# Altium PCB SubsystemA_NEW.PcbDoc
Units mm, origin at the board's own origin, x right, y up, seen from the top; angles counter-clockwise.
Board outline 128.27 x 38.1 mm, 2 copper layers (Top Layer, Bottom (GND)); 47 components, 32 nets, 124 pads, 22 vias.
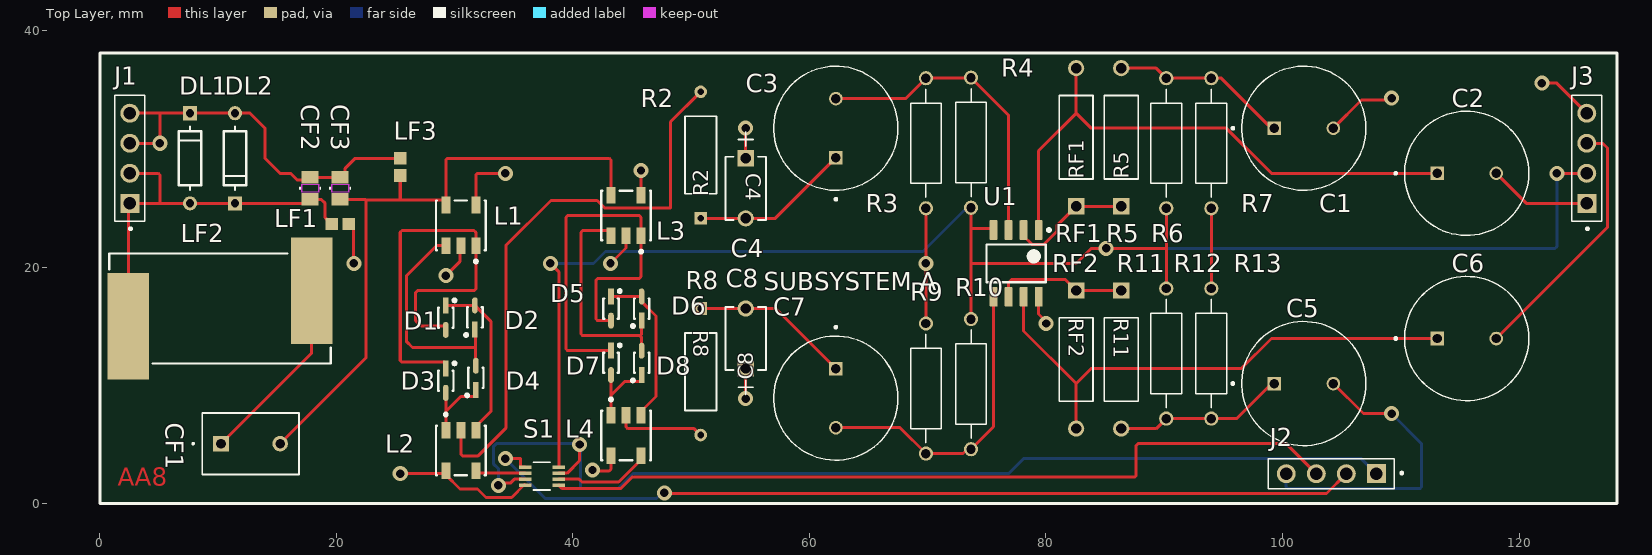
[diagram p0: Top Layer view]
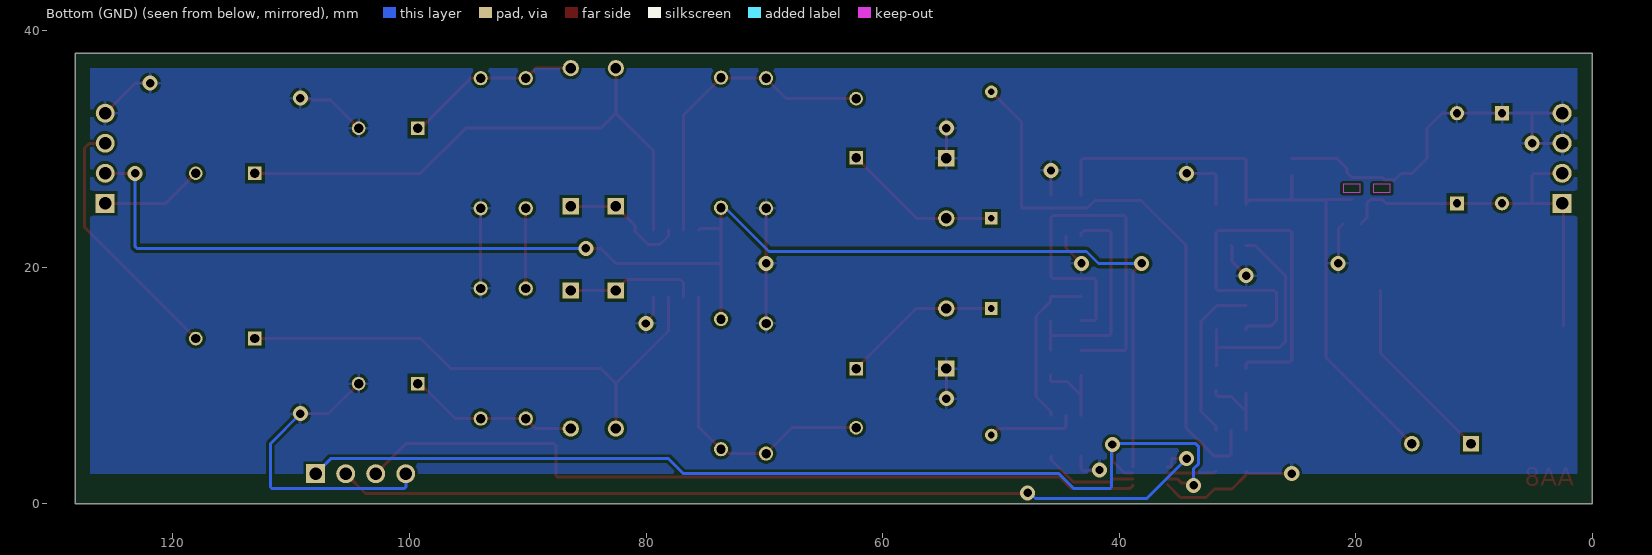
[diagram p1: Bottom (GND) view, seen from below]
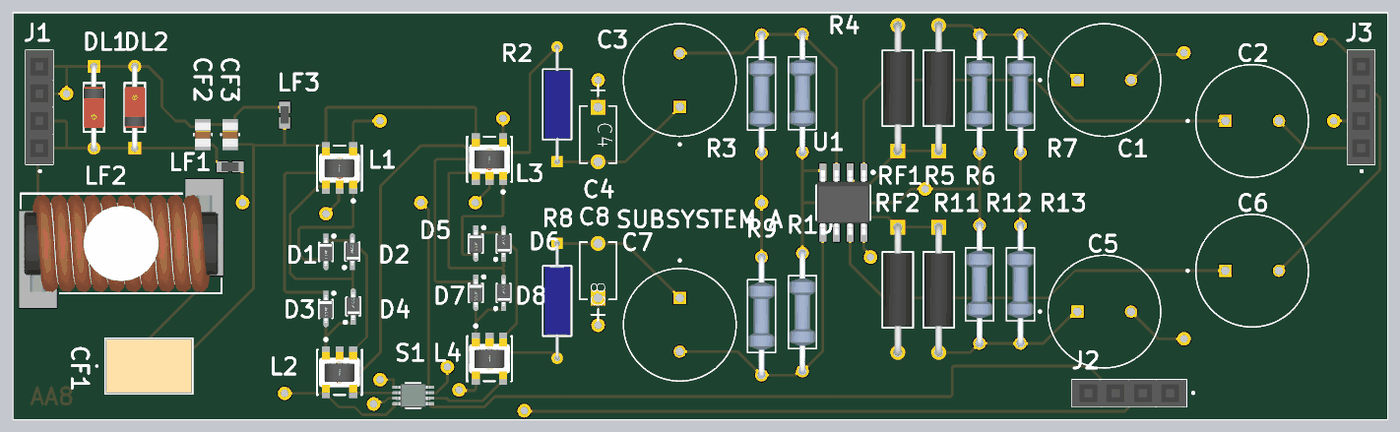
[diagram p2: 3D render of the assembled board from above, using the file's embedded part models]

## Layer stack, top to bottom
Top Solder: solder mask 0.0102, Solder Resist, Dk 3.5
Top Layer: signal copper 0.0356
Dielectric 1: dielectric 0.32, FR-4, Dk 4.8
Bottom (GND): signal copper 0.0356
Bottom Solder: solder mask 0.0102, Solder Resist, Dk 3.5

## Board outline
0,38.1 0,0 128.27,0 128.27,38.1

## Design rules (kind name [scope] priority, off if disabled: settings)
Clearance [All] p1: gap=0.254 ignorepadtopadclearanceinfootprint=FALSE except(0: Arc-Hole Track-Hole SMDPad-Hole THPad-Hole Via-Hole Fill-Hole Poly-Hole Region-Hole Text-Hole)
PolygonConnect [All] p1: connectstyle=Relief reliefconductorwidth=0.254 reliefentries=4 polygonreliefangle="90 Angle" airgapwidth=0.254
RoutingVias [All] p1: holewidth=0.711 width=1.27 viastyle="Through Hole" minholewidth=0.711 minwidth=1.27 maxholewidth=0.711 maxwidth=1.27
SolderMaskExpansion [All] p1: expansion=0.102 istentingtop=FALSE
SupplyNets "Schematic Supply Nets_1" [InNet('+5')] p1: voltage=0.000
SupplyNets "Schematic Supply Nets" [InNet('GND')] p2: voltage=0.000
Width [All] p1: maxlimit=0.254 minlimit=0.254 preferedwidth=0.254
30 further rules are at their usual default settings.

## Components (designator, comment, footprint, x,y, rotation, side; value= is the part's Value field where it differs from the comment)
C1 "470uF" CAPPRD500W60D1050H2200 101.798,31.75 r180 top
C2 "470uF" CAPPRD500W60D1050H2200 115.57,27.94 r180 top
C3 "470uF" CAPPRD500W60D1050H2200 62.23,31.75 r270 top
C4 "10nF" CAP_C322C511_MR_KEM 54.61,29.21 r270 top
C5 "470uF" CAPPRD500W60D1050H2200 101.798,10.16 r180 top
C6 "470uF" CAPPRD500W60D1050H2200 115.57,13.97 r180 top
C7 "470uF" CAPPRD500W60D1050H2200 62.23,8.93 r90 top
C8 "10nF" CAP_C322C511_MR_KEM 54.61,11.43 r90 top
CF1 "100pF" CAP_FKP20101001D00KSSD_WIM 10.24,5.08 r0 top
CF2 "390pF" CAP_J1_PAN 17.78,26.67 r270 top
CF3 "390pF" CAP_J1_PAN 20.32,26.67 r270 top
D1 "BAT54WS-TP" FP-SOD-323-IPC_B 29.25,15.721 r270 top
D2 "BAT54WS-TP" FP-SOD-323-IPC_B 31.71,15.75 r90 top
D3 "BAT54WS-TP" FP-SOD-323-IPC_B 29.25,10.397 r270 top
D4 "BAT54WS-TP" FP-SOD-323-IPC_B 31.79,10.641 r90 top
D5 "BAT54WS-TP" FP-SOD-323-IPC_B 43.22,16.502 r270 top
D6 "BAT54WS-TP" FP-SOD-323-IPC_B 45.81,16.502 r90 top
D7 "BAT54WS-TP" FP-SOD-323-IPC_B 43.22,11.911 r270 top
D8 "BAT54WS-TP" FP-SOD-323-IPC_B 45.81,11.911 r90 top
DL1 "1N914B" FP-017AG-MFG 7.62,29.21 r270 top value=4pF
DL2 "1N914B" FP-017AG-MFG 11.43,29.21 r90 top value=4pF
J1 "PPTC041LFBN-RC" SULLINS_PPTC041LFBN-RC 2.54,29.21 r90 top
J2 "PPTC041LFBN-RC" SULLINS_PPTC041LFBN-RC 104.124,2.54 r180 top
J3 "PPTC041LFBN-RC" SULLINS_PPTC041LFBN-RC 125.73,29.21 r90 top
L1 "MABAES0060" FP-MABAES0060-MFG 30.52,23.542 r270 top
L2 "MABAES0060" FP-MABAES0060-MFG 30.52,4.492 r90 top
L3 "MABAES0060" FP-MABAES0060-MFG 44.49,24.367 r270 top
L4 "MABAES0060" FP-MABAES0060-MFG 44.49,5.762 r90 top
LF1 "500nH" INDC1608X100N 20.32,23.662 r180 top
LF2 "1.96uH" 7847229020 10.16,16.51 r0 top
LF3 "500nH" INDC1608X100N 25.4,28.482 r270 top
R2 "165" RES_MFR25_6P3X2P4_YAG 50.8,24.13 r90 top
R3 "10k" RESAD1100W55L680D260 69.85,30.48 r270 top
R4 "10k" RESAD1100W55L680D260 73.66,30.527 r90 top
R5 "1k" YAG_MF25_YAG 86.36,25.146 r90 top
R6 "10k" RESAD1100W55L680D260 90.17,30.48 r270 top
R7 "10k" RESAD1100W55L680D260 93.98,30.48 r90 top
R8 "165" RES_MFR25_6P3X2P4_YAG 50.8,16.51 r270 top
R9 "10k" RESAD1100W55L680D260 69.85,9.74 r90 top
R10 "10k" RESAD1100W55L680D260 73.66,10.113 r270 top
R11 "1k" YAG_MF25_YAG 86.36,18.034 r270 top
R12 "10k" RESAD1100W55L680D260 90.17,12.7 r270 top
R13 "10k" RESAD1100W55L680D260 93.98,12.7 r90 top
RF1 "48.7k" YAG_MF25_YAG 82.55,25.146 r90 top
RF2 "48.7k" YAG_MF25_YAG 82.55,18.034 r270 top
S1 "FSA1259AK8X" US8-8_2P1X2P4_ONS 37.383,2.33 r0 top
U1 "OPA1642AIDR" D0008A_M 77.47,20.32 r270 top

## Footprints (in the part's own frame and the unit in brackets; to place one, negate y for a bottom-side part, rotate by r counter-clockwise, add the part's x,y. Pads: shape width x height; smd on the part's side, far side on the other; paste and mask are expansions set on the pad)
7847229020 [mm] "Rod Core Inductor SMT, body 18.1x9.3mm"
  rect 3.5x9 smd: 1(-7.75,-1.5) 2(7.75,1.5)
  silkscreen extent -9.35,-4.65 9.35,4.65, body extent -9.05,-4.57 9.05,4.57, height 10.03
CAP_C322C511_MR_KEM [mil]
  rect 54x54 hole 34 paste-99999 mask+0: 1(0,0)
  round 54 hole 34 paste-99999 mask+0: 2(200,0)
  silkscreen extent -87,-68 205,68
CAP_FKP20101001D00KSSD_WIM [mil]
  rect 52x52 / inner round 60 / far side rect 52x52 hole 32 paste-99999 mask+0: 1(0,0)
  round 52 / inner round 60 / far side round 52 hole 32 paste-99999 mask+0: 2(196.85,0)
  silkscreen extent -96,-102 259,102, body extent -58,-97 254,97, height 260
CAP_J1_PAN [mil]
  rect 42x57 smd paste+0 mask+0: 1(-36.5,0) 2(36.5,0)
  Top Layer keep-out region: -13.5,-26.5 -13.5,26.5 13.5,26.5 13.5,-26.5
  Keep-Out Layer region: -13.5,-28.5 -13.5,28.5 13.5,28.5 13.5,-28.5
  silkscreen extent -3,-34 3,34, body extent -44,-29 44,29, height 43
CAPPRD500W60D1050H2200 [mm]
  rect 1.15x1.15 / inner round 1.15 / far side rect 1.15x1.15 hole 0.8: 1(2.5,0)
  round 1.15 hole 0.8: 2(-2.5,0)
  silkscreen extent -5.25,-5.25 6.1,5.25
D0008A_M [mm] "SOIC, 8-Leads, Body 5x4mm, Pitch 1.27mm, IPC Low Density"
  rrect15% 1.65x0.65 smd: 1(-2.825,1.905) 2(-2.825,0.635) 3(-2.825,-0.635) 4(-2.825,-1.905) 5(2.825,-1.905) 6(2.825,-0.635) 7(2.825,0.635) 8(2.825,1.905)
  silkscreen extent -2.95,-2.5 1.6,2.91, body extent -3,-2.45 3,2.45, height 1.63
FP-017AG-MFG [mm]
  rect 1.2x1.2 hole 0.7 paste-2539.97 mask+0: 1(-3.813,0)
  round 1.2 hole 0.7 paste-2539.97 mask+0: 2(3.813,0)
  silkscreen extent -2.68,-0.95 2.68,0.95, body extent -4.51,-1.05 4.51,1.05, height 0.25
FP-MABAES0060-MFG [mm]
  rect 1.4x0.76 smd paste+0 mask+0: 1(1.715,1.27) 2(1.715,0) 3(1.715,-1.27) 4(-1.715,-1.27) 5(-1.715,1.27)
  silkscreen extent -2.09,-2.09 3.18,2.09, body extent -2.51,-2.19 2.51,2.19, height 0.25
FP-SOD-323-IPC_B [mm]
  rect 1.355x0.476 smd paste+0 mask+0: 1(-1.026,0)
  rrect100% 1.355x0.476 smd paste+0 mask+0: 2(1.026,0)
  silkscreen extent -1.6,-0.65 0.85,0.86, body extent -1.95,-0.87 1.95,0.87, height 0.25
INDC1608X100N [mm]
  rect 1.06x1.02 smd: 1(-0.728,0) 2(0.728,0)
  body extent -0.8,-0.4 0.8,0.4, height 1
RES_MFR25_6P3X2P4_YAG [mil]
  rect 42x42 hole 22 paste-99999 mask+0: 1(0,0)
  round 42 hole 22 paste-99999 mask+0: 2(421.26,0)
  silkscreen extent 82,-52 340,53, body extent -6,-47 427,47, height 95
RESAD1100W55L680D260 [mm]
  round 1.2 hole 0.8: 1(-5.5,0) 2(5.5,0)
  silkscreen extent -4.58,-1.3 4.58,1.3, body extent -5.77,-1.2 5.77,1.2, height 2.4
SULLINS_PPTC041LFBN-RC [mm]
  rect 1.605x1.605 / inner round 1.605 / far side rect 1.605x1.605 hole 1.07: 1(-3.81,0)
  round 1.605 hole 1.07: 2(-1.27,0) 3(1.27,0) 4(3.81,0)
  silkscreen extent -6.06,-1.27 5.33,1.27, body extent -5.33,-1.27 5.33,1.27, height 8.51
US8-8_2P1X2P4_ONS [mil]
  rect 42x11 smd paste+0 mask+0: 1(-56,30) 2(-56,10) 3(-56,-10) 4(-56,-30) 5(56,-30) 6(56,-10) 7(56,10) 8(56,30)
  silkscreen extent -28,-46 28,46, body extent -63,-41 63,41, height 35
YAG_MF25_YAG [mil]
  rect 54x54 hole 34 paste-99999 mask+0: 1(0,0)
  round 54 hole 34 paste-99999 mask+0: 2(460,0)
  silkscreen extent 91,-56 369,57, body extent -12,-51 472,51, height 103

## Part data
C1 C2 C3 C5 C6 C7: library part UPW1V471MPD, Package=None, Availability=Unavailable, MP=UPW1V471MPD, Price=None
C4 C8: library part C322C103K3G5TA, "No Description Available", Manufacturer_Name=Kemet, Copyright="Copyright (C) 2026 Ultra Librarian. All rights reserved.", Manufacturer_Part_Number=C322C103K3G5TA
CF1: library part FKP2O101001D00KSSD, "Description", Manufacturer_Name=Wima, Copyright="Copyright (C) 2025 Ultra Librarian. All rights reserved.", Manufacturer_Part_Number=FKP2O101001D00KSSD
CF2 CF3: library part ECH-U1H391GX5, "No Description Available", Manufacturer_Name=Panasonic, Copyright="Copyright (C) 2026 Ultra Librarian. All rights reserved.", Manufacturer_Part_Number=ECH-U1H391GX5
D1 D2 D3 D4 D5 D6 D7 D8: library part CMP-56206-000013-1, "DIODE SCHOTTKY 30V 200MA SOD323", Average Rectified Current=200mA, Capacitance=2pF, Forward Voltage=1V, Max Operating Temperature=125°C, Max Repetitive Reverse Voltage (Vrrm)=30V, Max Reverse Current=2uA, Max Reverse Leakage Current=500nA, Min Operating Temperature=-55°C, Package Quantity=1, Peak Non-Repetitive Surge Current=600mA, Power Dissipation=200mW, Current Rating=200mA, Element Configuration=Single, Forward Current=200mA, Height=1mm, Lead Free="Lead Free", Length=1.8mm, Max Forward Surge Current (Ifsm)=200mA, Max Reverse Voltage (DC)=30V, Mount="Surface Mount", Number of Pins=2, Output Current=200mA, Packaging="Tape and Reel", Polarity=Standard, Radiation Hardening=No, Reverse Recovery Time=5ns, RoHS Compliant=Yes, Voltage Rating (DC)=30V, Width=1.35mm
DL1 DL2: library part CMP-07163-000001-1, "DIODE GEN PURP 100V 200MA DO35", Capacitance=4pF, Forward Current=300mA, Manufacturer="ON Semiconductor", Max Junction Temp=+175°C, Max Repetitive Reverse Voltage=100V, Max Surge Forward Current=1A, Package=017AG, Peak Reverse Current=5uA, Temperature="-55°C to +175°C", Temperature Range Low=-55°C, Automotive=No, Category=Diode, ComponentLink2Description=Datasheet, ComponentLink2URL=https://www.onsemi.com/pub/Collateral/1N914-D.PDF, Device Class L1="Discrete Semiconductors", Device Class L2=Diodes, Device Class L3="Rectifier Diodes", Digikey Description="DIODE GEN PURP 100V 200MA DO35", Footprint Url=https://www.onsemi.com/pub/Collateral/017AG.PDF, Height=1.91mm, Lead Free=Yes, Manufacturer Part Number=1N914B, Mouser Description="Diodes - General Purpose, Power, Switching 100V Io/200mA BULK", Octopart=https://octopart.com/1n914b-on+semiconductor-84323163, Reverse Voltage=100V, RoHS=TRUE, Temperature Range High=+175°C
J1 J2 J3: "4 Position Header Connector 0.100 (2.54mm) Through Hole Tin", Package=None, Check_prices=https://www.snapeda.com/parts/PPTC041LFBN-RC/Sullins/view-part/?ref=eda, MF="Sullins Connector", MP=PPTC041LFBN-RC, SnapEDA_Link=https://www.snapeda.com/parts/PPTC041LFBN-RC/Sullins/view-part/?ref=snap
L1 L2 L3 L4: library part CMP-97513-000003-1, "BALUN 300KHZ-200MHZ 1:1 6SMD", Case/Package=SMD/SMT, Max DC Current=500mA, Max Operating Temperature=85°C, Min Operating Temperature=-40°C, Package Quantity=2000, Power Rating=500mW, Depth=3.81mm, Height=2.67mm, Insertion Loss=1.5dB, Lead Free="Lead Free", Lead/Base Style="Gull Wing", Length=3.81mm, Mount="Surface Mount", Number of Pins=5, Packaging="Tape and Reel", Radiation Hardening=No, Termination=SMD/SMT, Turns Ratio=1:1, Width=3.81mm
LF1 LF3: library part BRC1608TR50M6, "500 nH Unshielded Drum Core, Wirewound Inductor 1.05 A 90mOhm 0603 (1608 Metric)", Package="1608 Taiyo Yuden", Check_prices=https://www.snapeda.com/parts/BRC1608TR50M6/Taiyo+Yuden/view-part/?ref=eda, MF="Taiyo Yuden", MP=BRC1608TR50M6, SnapEDA_Link=https://www.snapeda.com/parts/BRC1608TR50M6/Taiyo+Yuden/view-part/?ref=snap
LF2: library part CMP-03913-112295598-3, "Inductor, 1.96Uh, Unshielded, 15A Rohs Compliant: Yes", Ambient Temperature Range High=110°C, Ambient Temperature Range Low=-40°C, Current Rating=15A, DC Resistance (DCR)=2.4mΩ, Inductance=1.96µH, Max Operating Temperature=150°C, Diameter=9.3mm, Height=10mm, Length=18mm, Min Operating Temperature=-40°C, Pin Length=5.5mm, RoHS=Compliant
R2 R8: library part MFR-25FRF52-165R, "No Description Available", Manufacturer_Name=Yageo, Copyright="Copyright (C) 2026 Ultra Librarian. All rights reserved.", Manufacturer_Part_Number=MFR-25FRF52-165R
R3 R4 R6 R7 R9 R10 R12 R13: library part MFR-25FRF52-10K, "10.5 kOhms Â±1% 0.25W, 1/4W Through Hole Resistor Axial - Metal Film", Package="RADIAL-2 YAGEO", Check_prices=https://www.snapeda.com/parts/MFR-25FRF52-10K/Yageo/view-part/?ref=eda, MF=Yageo, MP=MFR-25FRF52-10K, SnapEDA_Link=https://www.snapeda.com/parts/MFR-25FRF52-10K/Yageo/view-part/?ref=snap
R5 R11: library part MFR-25FRF52-1K, "Description", Manufacturer_Name=Yageo, Copyright="Copyright (C) 2025 Ultra Librarian. All rights reserved.", Manufacturer_Part_Number=MFR-25FRF52-1K
RF1 RF2: library part MFR-25FBF52-48K7, "No Description Available", Manufacturer_Name=Yageo, Copyright="Copyright (C) 2026 Ultra Librarian. All rights reserved.", Manufacturer_Part_Number=MFR-25FBF52-48K7
S1: "No Description Available", Manufacturer_Name="onsemi / Fairchild Semiconductor", Copyright="Copyright (C) 2026 Ultra Librarian. All rights reserved.", Manufacturer_Part_Number=FSA1259AK8X, RefDes=RefDes, Type=Type
U1: library part CMP-0808-00011-2, "Sound-Plus High-Performance, JFET-Input Audio Operational Amplifier, 4.5 to 36 V, -40 to 85 degC, 8-pin SOIC (D8), Green (RoHS & no Sb/Br)", Manufacturer="Texas Instruments", Code_JEDEC=MS-012, ComponentLink1Description="Manufacturer URL", ComponentLink1URL=http://www.ti.com/, ComponentLink2Description=Datasheet, ComponentLink2URL=http://www.ti.com/general/docs/lit/getliterature.tsp?genericPartNumber=OPA1642&fileType=pdf, ComponentLink3Description="Package Specification", ComponentLink3URL=http://www.ti.com/litv/pdf/msoi002j, DatasheetVersion=SBOS484B, Eco-Plan="Green (RoHS & no Sb/Br)", GBW(Typ)(MHz)=11, Iq per channel(Max)(mA)=2.3, Mounting Technology="Surface Mount", Number of Channels=2, PackageDescription="8-Pin Plastic Small Outline, Body 4.9 x 3.9 mm, Pitch 1.27 mm", PackageReference=D0008A, PackageVersion="4040047-3/M, 06/2011", PartNumber=OPA1642AIDR, SubFamily="Audio Operational Amplifier", Vmax(V)=36, Vmin(V)=5, Vn at Flatband(Typ)(nV/rtHz)=5.1

## Via types
v1: diameter 1.27, hole 0.711, Top Layer to Bottom (GND), 22 vias

## Nets (pads, with @x,y where several pads share a name; then routed paths per layer and width w, separated by ;. In a path a pad name is that pad's centre, name@x,y a point inside that pad or via, vN(x,y) a via of type N, cw(c..) or ccw(c..) an arc to the next point about the centre after c; other vN are vias at no path point)
+5: J3.2 R4.1 R6.2 R10.1 R12.1 S1.8 U1.4 | length 137
  Top Layer w0.254: v1(38.1,20.32) 38.806,19.614 S1.8 ; R10.1@73.66,15.66 73.66,20.32 ; R4.1@73.66,24.98 73.66,23.285 ; U1.4 75.425,23.285 73.66,23.285 ; R12.1 90.17,21.59 ; R6.2 90.17,21.59 ; v1(123.19,27.94) J3.2 ; 73.66,20.32 82.55,20.32 83.82,21.59 v1(85.09,21.59) 90.17,21.59 ; 73.66,20.32 73.66,23.285
  Bottom (GND) w0.254: v1(38.1,20.32) 41.743,20.32 42.759,21.336 69.596,21.336 73.059,24.799 73.479,24.799 R4.1@73.66,24.98 ; v1(85.09,21.59) 123.041,21.59 123.19,21.739 v1(123.19,27.94)
GND: C1.2 C4.1 C5.2 C8.1 CF2.1 CF3.1 DL1.1 DL2.2 J1.3 J1.4 J2.4 J3.4 L1.2 L1.5 L2.5 L3.2 L3.5 L4.5 LF1.1 LF3.1 R3.2 R7.1 R9.2 R13.2 S1.4 U1.8 | length 125.2
  Top Layer w0.254: J1.3 v1(5.08,30.48) 5.079,30.481 5.079,33.02 ; J1.4 5.079,33.02 ; LF1.1 21.068,23.662 21.451,23.279 21.451,20.349 v1(21.48,20.32) ; v1(25.4,2.54) 29.013,2.54 L2.5 29.25,2.457 30.458,1.248 31.927,1.248 32.644,0.532 34.822,0.532 S1.4@35.91,1.62 ; LF3.1 21.59,29.21 20.743,28.363 20.743,28.003 20.336,27.597 CF3.1 CF2.1 17.577,27.394 16.672,27.394 16.126,27.94 15.24,27.94 13.97,29.21 13.97,31.753 12.7,33.023 DL2.2 DL1.1 7.617,33.02 5.079,33.02 ; v1(29.25,19.287) 30.434,20.471 30.434,21.741 L1.2 ; L1.5 31.79,27.791 31.938,27.94 v1(34.29,27.94) ; v1(41.656,2.854) 41.733,2.777 43.071,2.777 43.22,2.926 L4.5 ; v1(43.18,20.32) 44.49,21.63 L3.2 ; L3.5 v1(45.76,28.177) ; v1(54.61,8.89) C8.1 ; C4.1 v1(54.61,31.75) ; R9.2 v1(69.85,20.32) R3.2 ; U1.8 79.375,16.042 80.01,15.407 v1(80.01,15.24) ; R13.2 R7.1 ; C5.2 106.838,7.62 v1(109.22,7.62) ; C1.2 106.68,34.132 109.062,34.132 v1(109.22,34.29) ; v1(121.92,35.56) 123.19,35.56 J3.4
  Bottom (GND) w0.254: J2.4 100.314,1.419 100.463,1.27 111.611,1.27 111.76,1.419 111.76,5.08 v1(109.22,7.62)
NetC1_1: C1.1 R5.2 R6.1 R7.2 | length 14.9
  Top Layer w0.254: R5.2 89.32,36.83 R6.1 93.742,35.98 94.83,35.98 C1.1@99.1,31.71
NetC2_1: C2.1 RF1.2 U1.1 | length 47.6
  Top Layer w0.254: U1.1 79.375,29.845 82.55,33.02 ; RF1.2 82.55,33.02 ; C2.1 99.06,27.94 95.25,31.75 83.82,31.75 82.55,33.02
NetC2_2: C2.2 J3.1 | length 8.7
  Top Layer w0.254: C2.2 120.61,25.4 J3.1
NetC3_1: C3.1 C4.2 R2.1 | length 13.6
  Top Layer w0.254: R2.1 C4.2 57.11,24.13 C3.1
NetC3_2: C3.2 R3.1 R4.2 U1.3 | length 26.4
  Top Layer w0.254: C3.2 68.12,34.25 R3.1 69.874,36.004 73.636,36.004 R4.2 76.835,32.852 U1.3
NetC5_1: C5.1 R11.2 R12.2 R13.1 | length 14.3
  Top Layer w0.254: R11.2 89.32,6.35 R12.2 93.782,7.2 96.14,7.2 C5.1@99.1,10.16
NetC6_1: C6.1 RF2.2 U1.7 | length 45.1
  Top Layer w0.254: U1.7 78.105,14.605 82.55,10.16 ; RF2.2 82.55,10.16 ; C6.1 99.06,13.97 96.52,11.43 83.82,11.43 82.55,10.16
NetC6_2: C6.2 J3.3 | length 21.9
  Top Layer w0.254: C6.2 127.468,23.368 127.468,30.071 127.06,30.48 J3.3
NetC7_1: C7.1 C8.2 R8.1 | length 13.5
  Top Layer w0.254: R8.1 C8.2 57.15,16.51 C7.1
NetC7_2: C7.2 R9.1 R10.2 U1.5 | length 26.2
  Top Layer w0.254: C7.2 67.66,6.43 R9.1 72.984,4.24 73.404,4.66 R10.2@73.66,4.66 ; R10.2 75.565,6.518 U1.5
NetCF1_1: CF1.1 LF2.2 | length 16.1
  Top Layer w0.254: CF1.1 17.91,12.75 LF2.2
NetCF1_2: CF1.2 CF3.2 L1.4 L3.4 LF3.2 | length 55.8
  Top Layer w0.254: CF1.2 22.496,12.336 22.496,25.658 ; CF3.2 22.411,25.743 22.496,25.658 ; LF3.2 25.4,25.663 ; L3.4 43.22,29.061 43.071,29.21 29.398,29.21 29.25,29.061 L1.4 29.25,25.41 28.997,25.663 25.4,25.663 ; 22.496,25.658 22.502,25.663 25.4,25.663
NetCF2_2: CF2.2 DL1.2 DL2.1 J1.1 J1.2 LF1.2 LF2.1 | length 34.2
  Top Layer w0.254: LF2.1 2.41,25.27 J1.1 2.543,25.397 5.082,25.397 ; J1.2 4.933,27.94 5.082,27.791 5.082,25.397 ; LF1.2 19.572,23.662 19.05,24.184 19.05,25.4 18.736,25.714 17.809,25.714 CF2.2 17.434,25.397 DL2.1 DL1.2 5.082,25.397
NetD1_1: D1.1 D2.2 L2.3 | length 14.1
  Top Layer w0.254: D1.1@29.278,16.776 D2.2 33.06,15.427 33.06,7.797 31.79,6.527 L2.3
NetD1_2: D1.2 D3.1 L1.1 | length 37.1
  Top Layer w0.254: D3.1 29.25,11.862 29.139,11.973 25.549,11.973 25.4,12.122 25.4,22.948 25.549,23.097 31.641,23.097 31.79,22.948 L1.1 31.79,18.166 31.641,18.017 26.858,18.017 26.71,17.868 26.71,15.477 27.178,15.008 29.147,15.008 29.25,14.906 D1.2
NetD2_1: D2.1 D4.2 L1.3 | length 19.1
  Top Layer w0.254: L1.3 28.489,21.827 25.908,19.246 25.908,13.738 26.431,13.215 31.75,13.215 ; D2.1@31.75,14.725 31.75,13.215 ; D4.2 31.75,11.706 31.75,13.215
NetD3_2: D3.2 D4.1 L2.1 | length 6.7
  Top Layer w0.254: L2.1 29.25,7.789 ; D3.2 29.25,7.789 ; D4.1 31.79,9.176 31.679,9.065 30.526,9.065 29.25,7.789
NetD5_1: D5.1 D6.2 L4.3 | length 13.7
  Top Layer w0.254: D5.1 D6.2 45.81,17.088 47.03,15.868 47.03,9.067 45.76,7.797 L4.3
NetD5_2: D5.2 D7.1 L3.1 | length 35
  Top Layer w0.254: D7.1 39.558,12.937 39.41,13.086 39.41,24.218 39.558,24.367 45.611,24.367 45.76,24.218 45.76,19.199 45.611,19.05 42.098,19.05 41.95,18.901 41.95,15.626 42.098,15.477 D5.2
NetD6_1: D6.1 D8.2 L3.3 | length 19.2
  Top Layer w0.254: L3.3 43.22,22.844 42.967,23.097 40.828,23.097 40.68,22.948 40.68,14.356 40.828,14.207 45.661,14.207 ; D8.2 45.81,14.058 45.661,14.207 ; D6.1 45.81,14.356 45.661,14.207
NetD7_2: D7.2 D8.1 L4.1 | length 7
  Top Layer w0.254: L4.1 43.22,9.181 ; D7.2 43.22,9.181 ; D8.1 45.81,10.446 45.699,10.335 44.373,10.335 43.22,9.181
NetJ2_1: J2.1 S1.3 S1.7 | length 89.5
  Top Layer w0.254: v1(33.692,1.548) 33.882,1.738 34.708,1.738 35.046,2.076 S1.3 ; S1.7 39.509,2.584 40.566,3.641 v1(40.566,5.006)
  Bottom (GND) w0.254: v1(33.692,1.548) 33.692,2.971 33.274,3.389 33.274,4.826 33.528,5.08 40.491,5.08 40.64,4.931 40.64,1.419 40.789,1.27 43.815,1.27 45.085,2.54 76.827,2.54 78.097,3.81 106.664,3.81 J2.1
NetJ2_2: J2.2 S1.1 | length 75.8
  Top Layer w0.254: v1(34.29,3.81) 35.554,3.81 35.554,3.105 35.567,3.092 S1.1 ; v1@47.726,0.862 103.716,0.862 J2.2
  Bottom (GND) w0.254: v1(34.29,3.81) 37.65,0.45 47.069,0.45 47.537,0.918 v1(47.726,0.918)
NetJ2_3: J2.3 S1.5 | length 68.3
  Top Layer w0.254: S1.5 39.104,1.27 44.021,1.27 44.995,2.244 49.063,2.244 87.481,2.244 87.63,2.393 87.63,4.931 87.779,5.08 100.314,5.08 J2.3
NetL2_2: L2.2 R2.2 | length 48.9
  Top Layer w0.254: L2.2 30.52,4.196 30.668,4.047 31.987,4.047 34.33,6.39 34.33,21.827 38.14,25.637 42.046,25.637 42.682,25.001 48.26,25.001 48.26,32.29 R2.2
NetL2_4: L2.4 S1.2 | length 4.3
  Top Layer w0.254: L2.4 31.982,2.584 S1.2
NetL4_2: L4.2 R8.2 | length 7.6
  Top Layer w0.254: L4.2 44.49,6.499 44.638,6.35 50.257,6.35 50.797,5.81 R8.2
NetL4_4: L4.4 S1.6 | length 8.2
  Top Layer w0.254: S1.6 40.525,2.076 40.764,1.838 43.871,1.838 45.76,3.727 L4.4
NetR5_1: R5.1 RF1.1 U1.2 | length 10.7
  Top Layer w0.254: U1.2 78.105,22.645 78.811,21.939 79.829,21.939 80.91,23.02 80.91,23.506 RF1.1 R5.1
NetR11_1: R11.1 RF2.1 U1.6 | length 11.2
  Top Layer w0.254: U1.6 76.835,18.701 77.086,18.952 81.632,18.952 RF2.1 R11.1

## Polygon pours and split planes (outlines as drawn)
GND on Bottom (GND) "NONET_L-01_P-001" (solid, pour order 0): 1.27,36.83 1.27,2.54 127,2.54 127,36.83

## Other copper
Top Layer:
  text "AA8" at 1.524,1.524 h1.52

## Silkscreen, mask and mechanical layers (free items; w line width, h text height)
Top Overlay:
  the board outline again, w0.254
  text "SUBSYSTEM A" at 56.134,18.034 h1.52
Mechanical 1:
  the board outline again, w0.254

## Text inside footprints (layer, text, board x,y; h text height)
CF1: Mechanical 13 "RefDes2" at 10.517,4.445 h1.27
S1: Mechanical 13 "*" at 36.253,2.038 h1.27